# Altium PCB oscill_pcb.PcbDoc (part 1 of 2)
Units mm, origin at the board's own origin, x right, y up, seen from the top; angles counter-clockwise.
Board outline 100 x 110 mm, 4 copper layers (Top Layer, GND, Power, Bottom Layer), stack 1.565 mm thick; 124 components, 88 nets, 532 pads, 164 vias.
Unrouted connection lines stored in the file: 9.
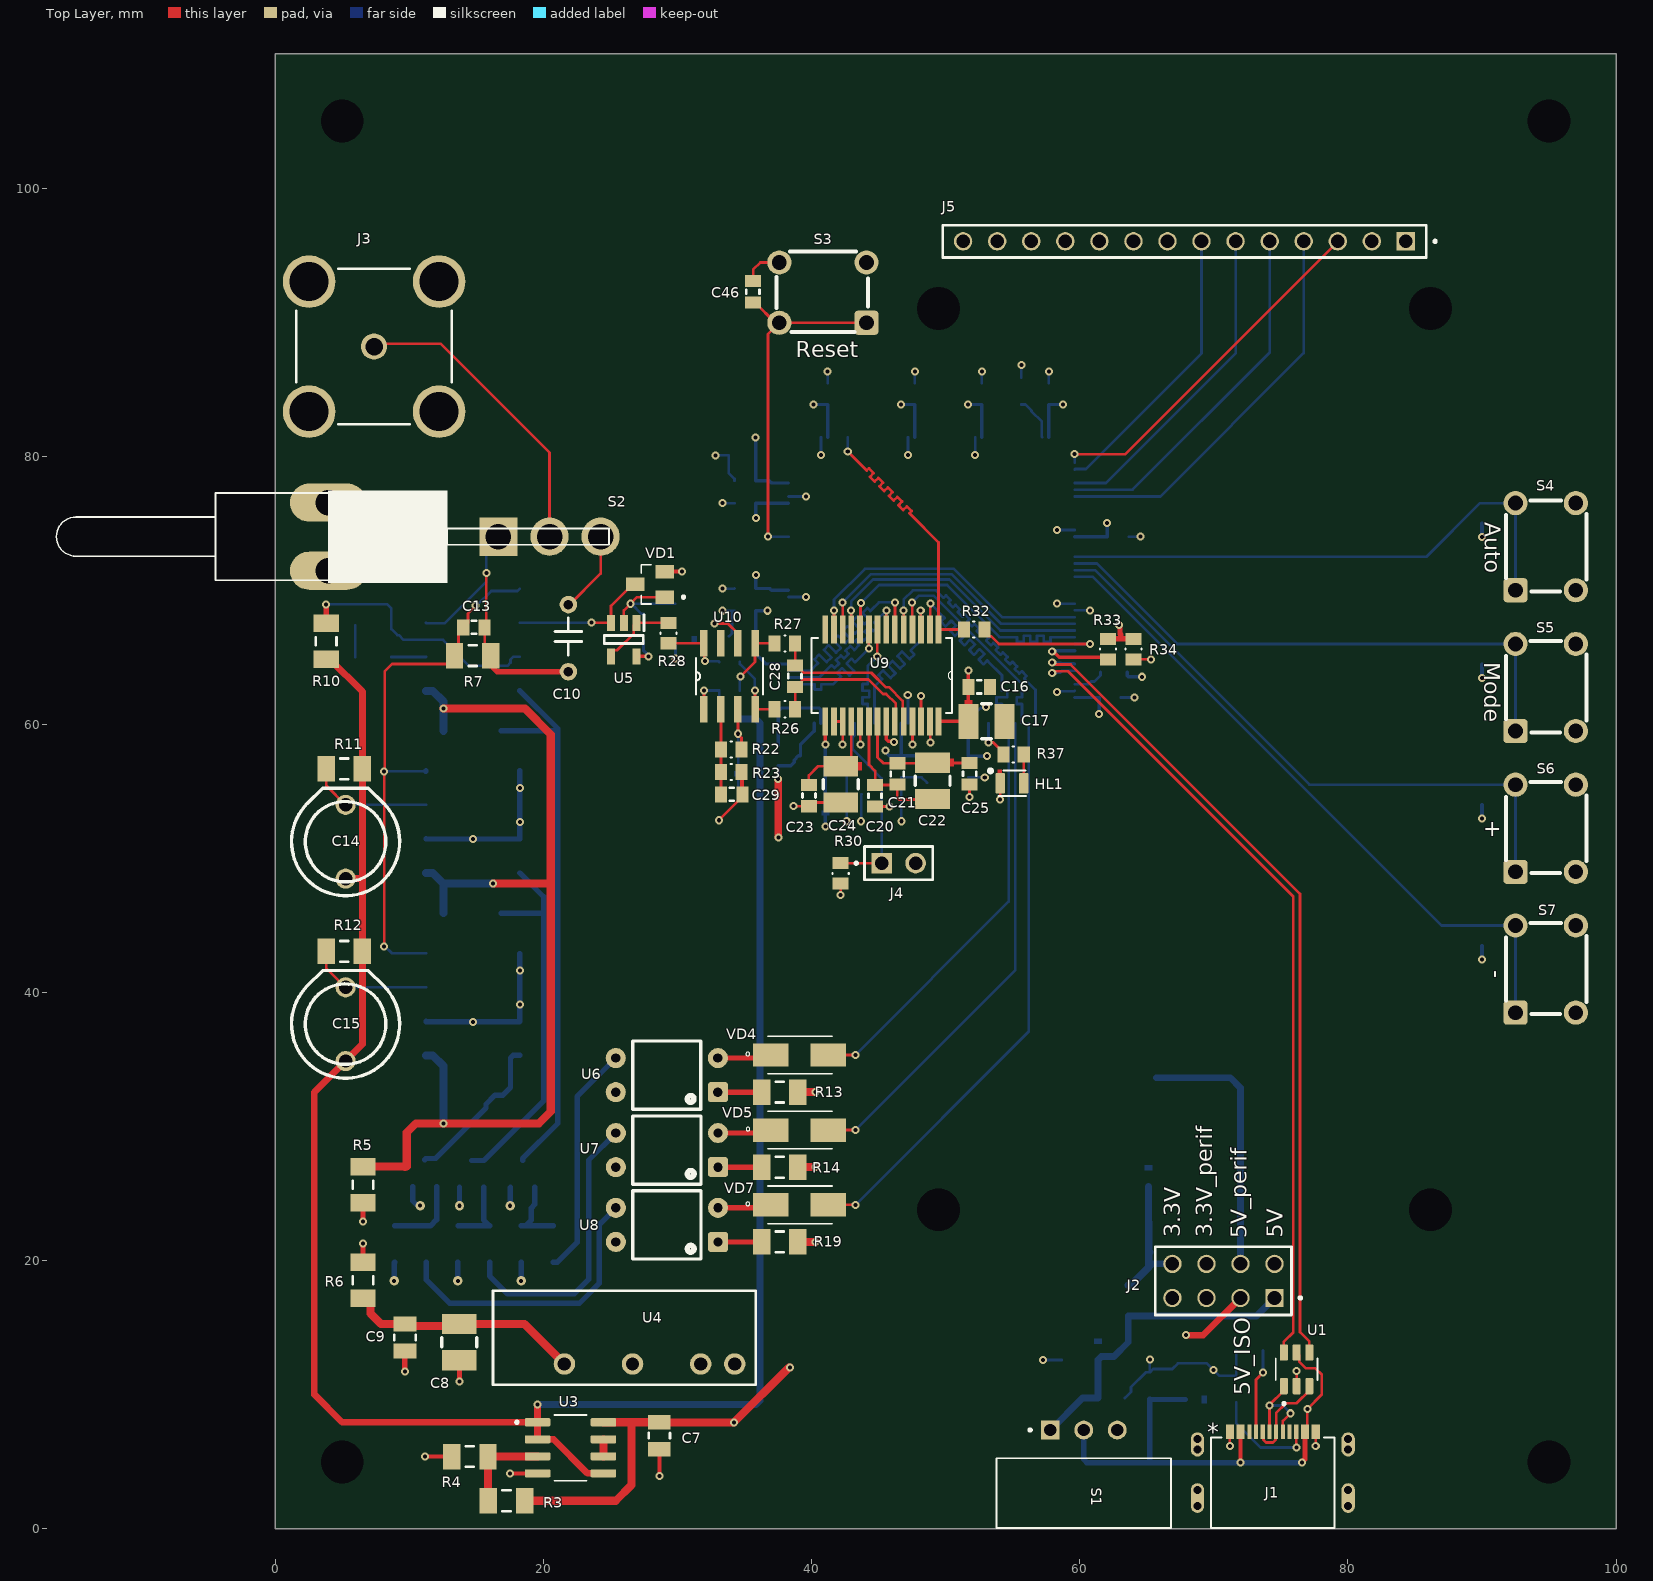
[diagram p0: Top Layer view]
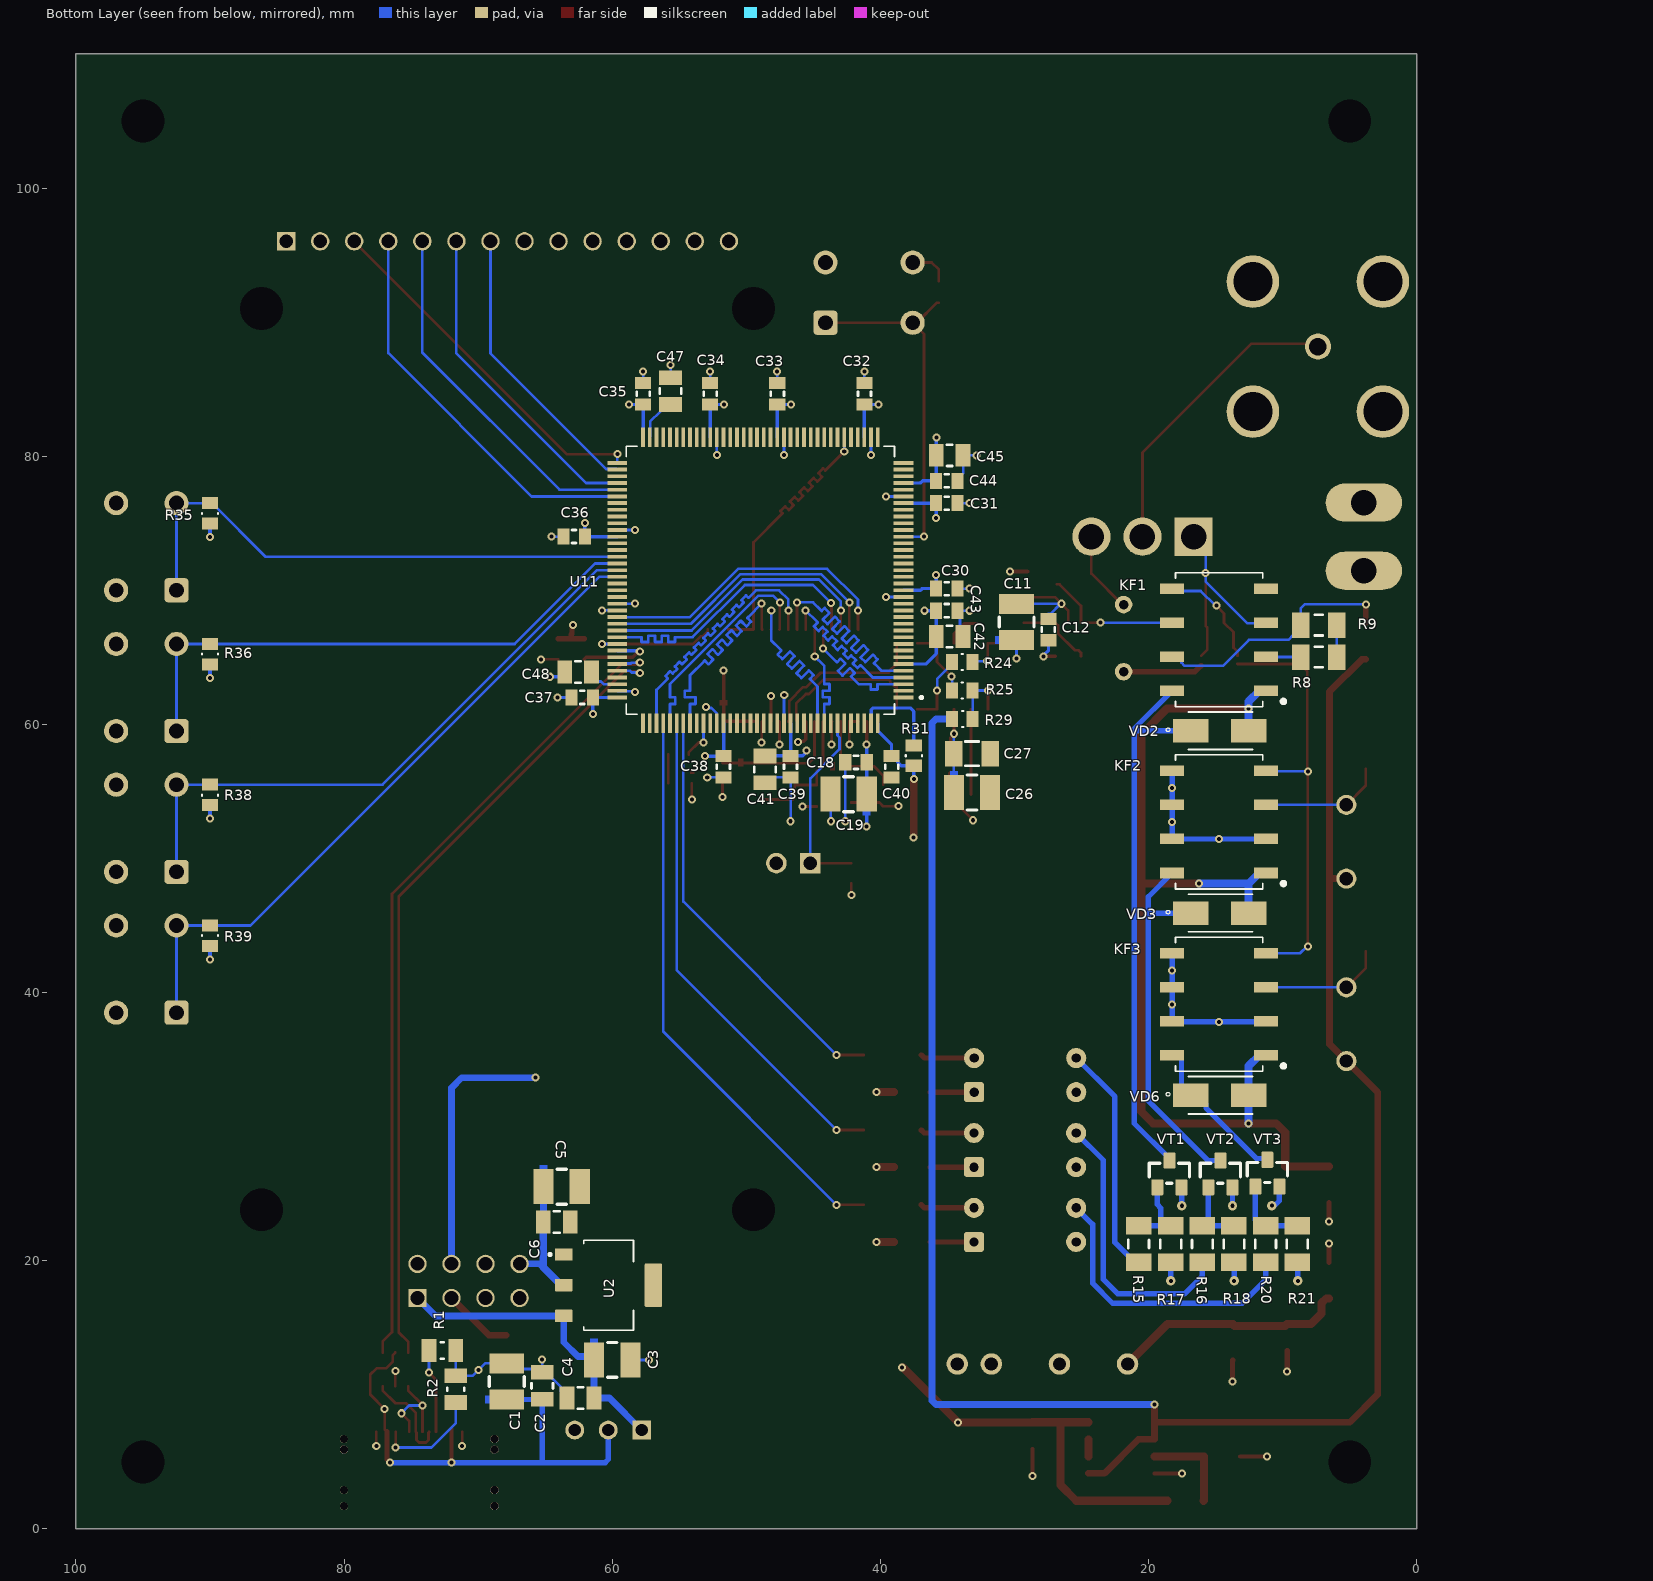
[diagram p1: Bottom Layer view, seen from below]
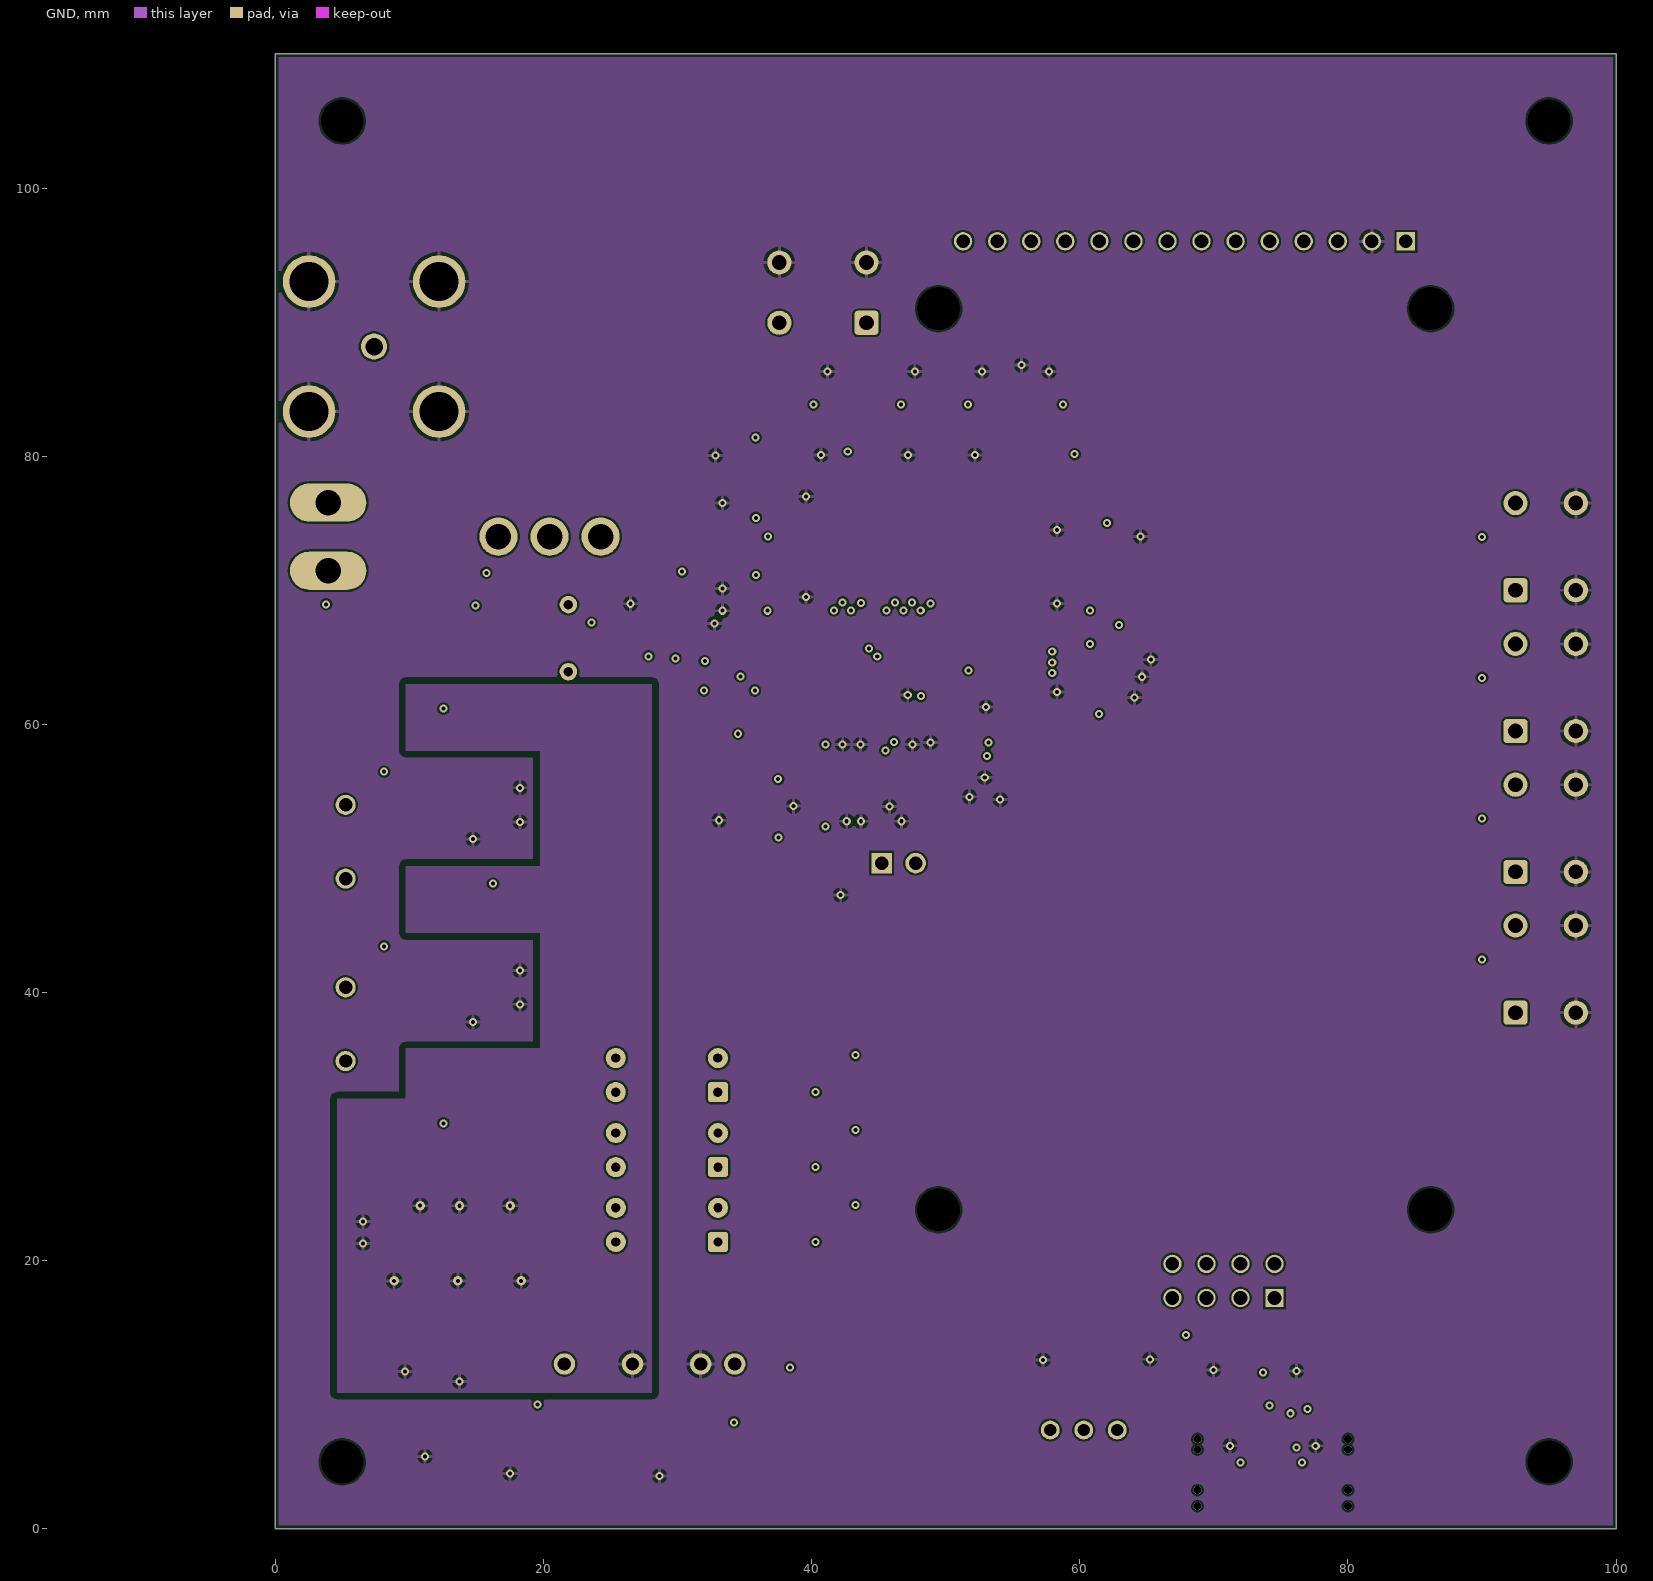
[diagram p2: GND]
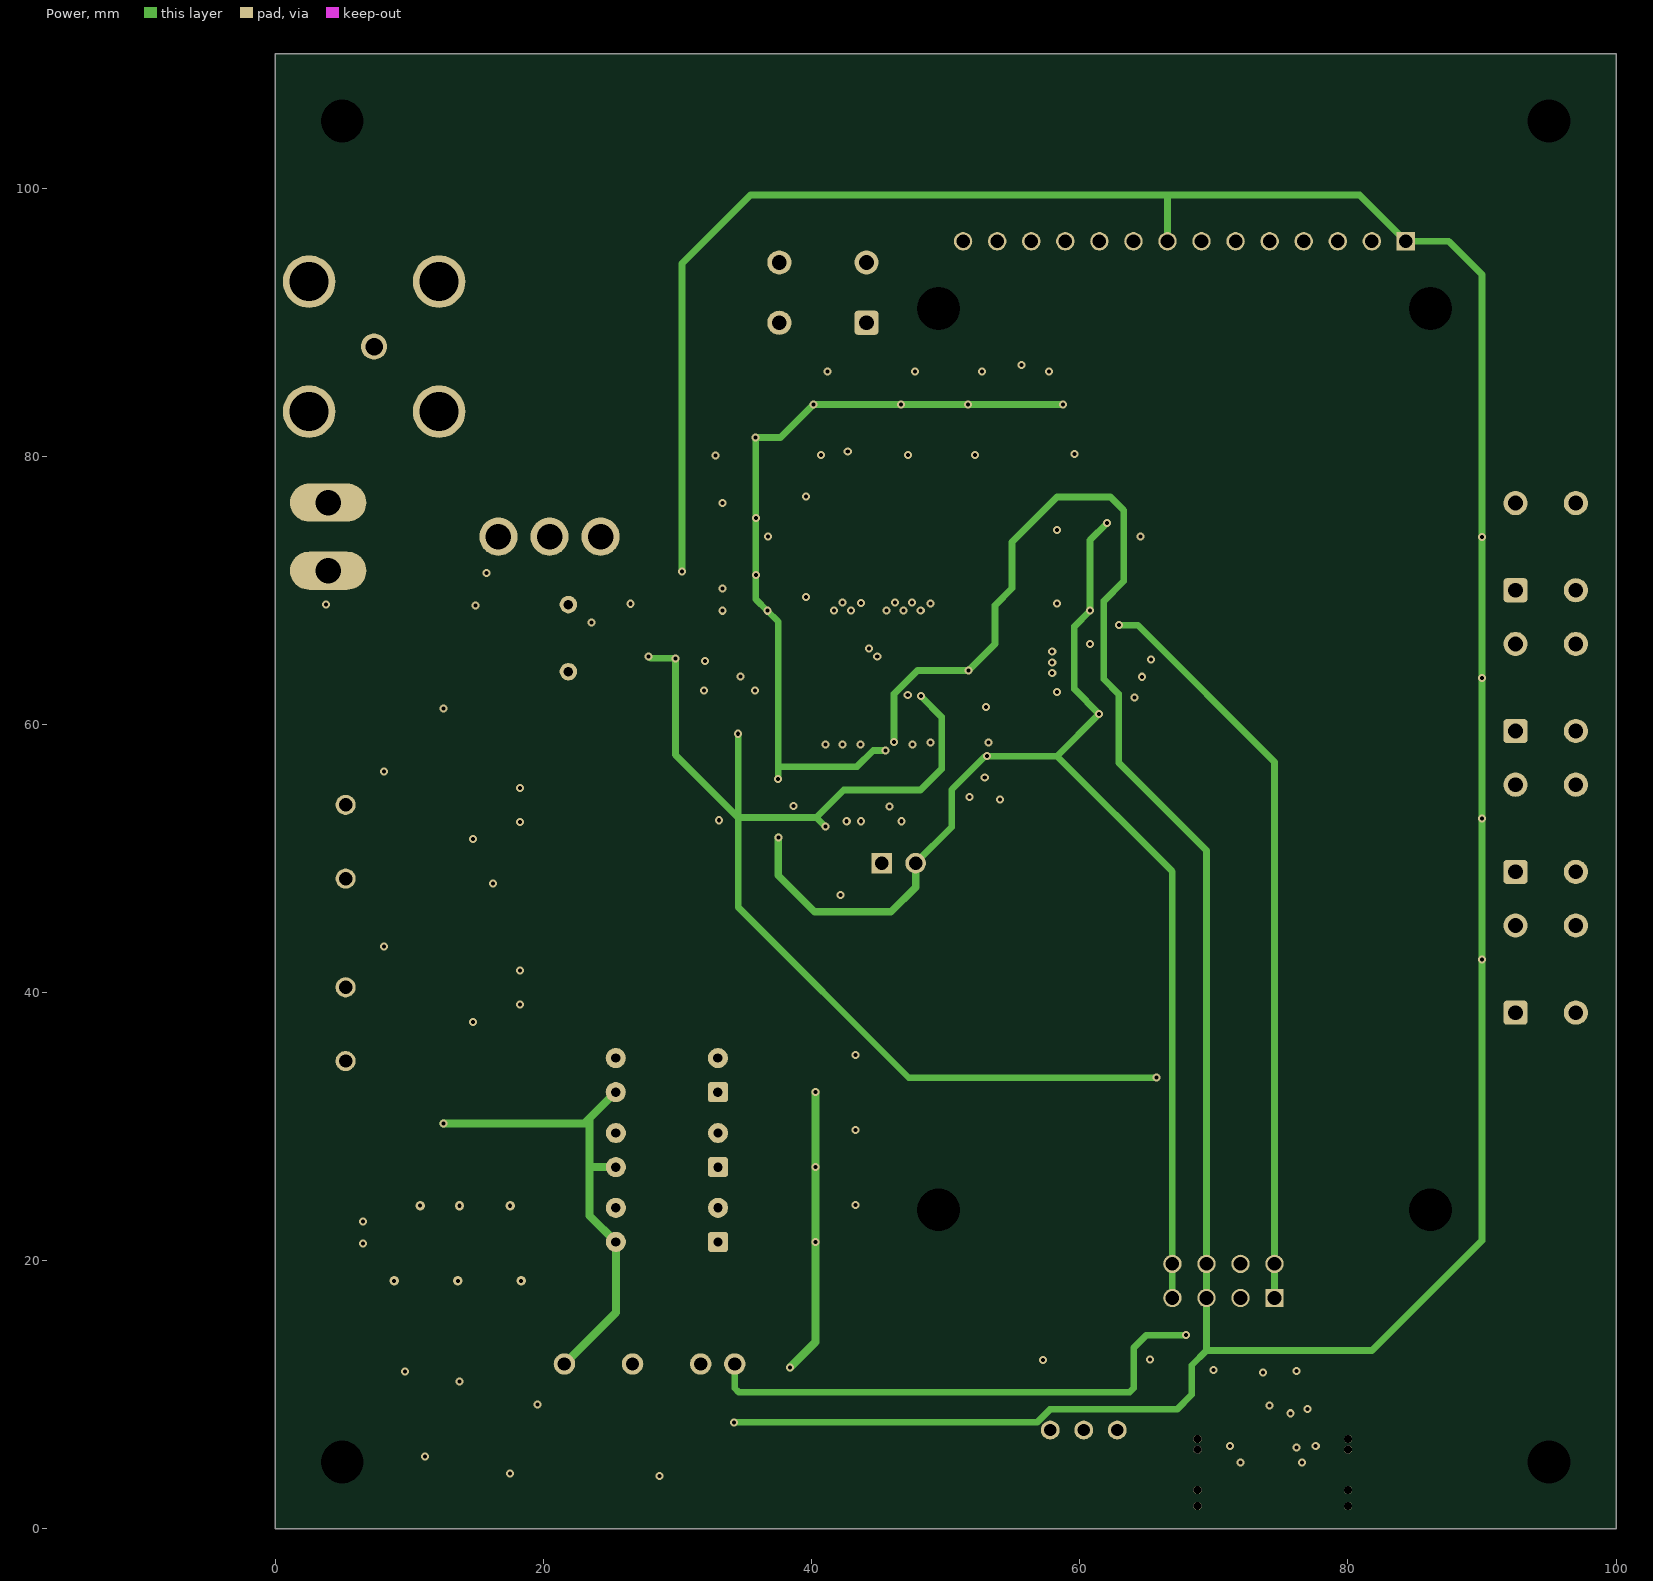
[diagram p3: Power]
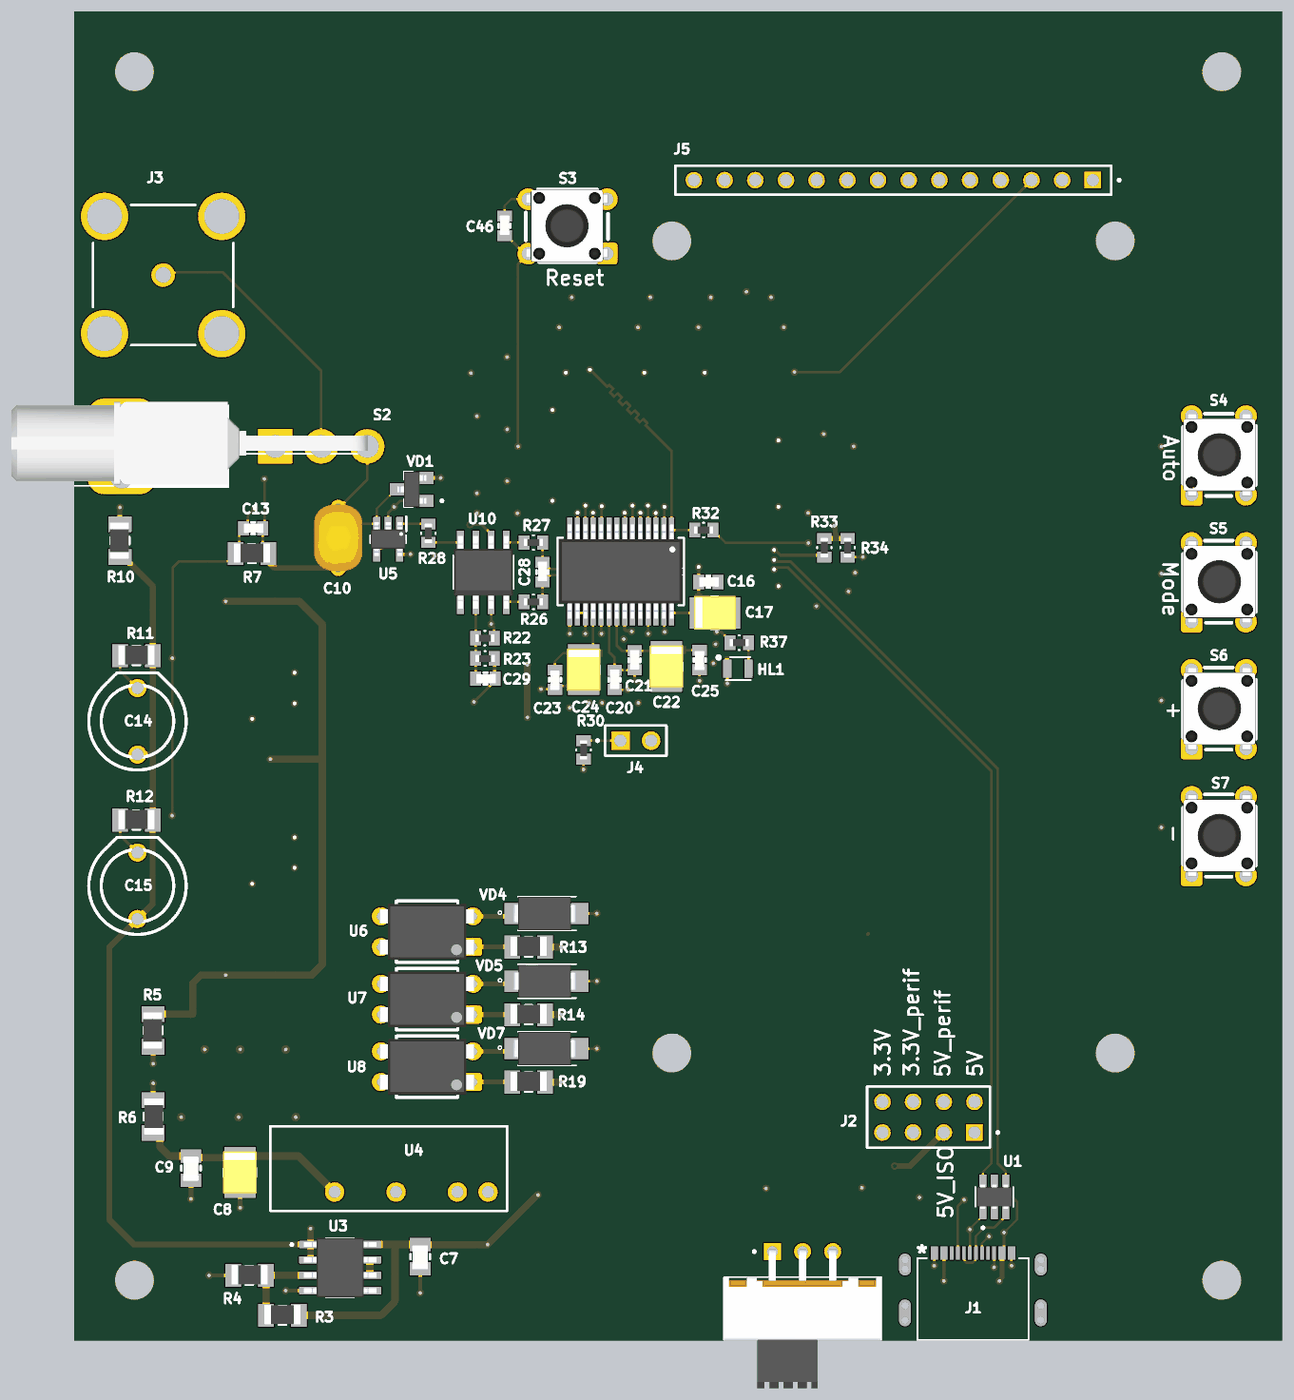
[diagram p5: 3D render of the assembled board from above, using the file's embedded part models]
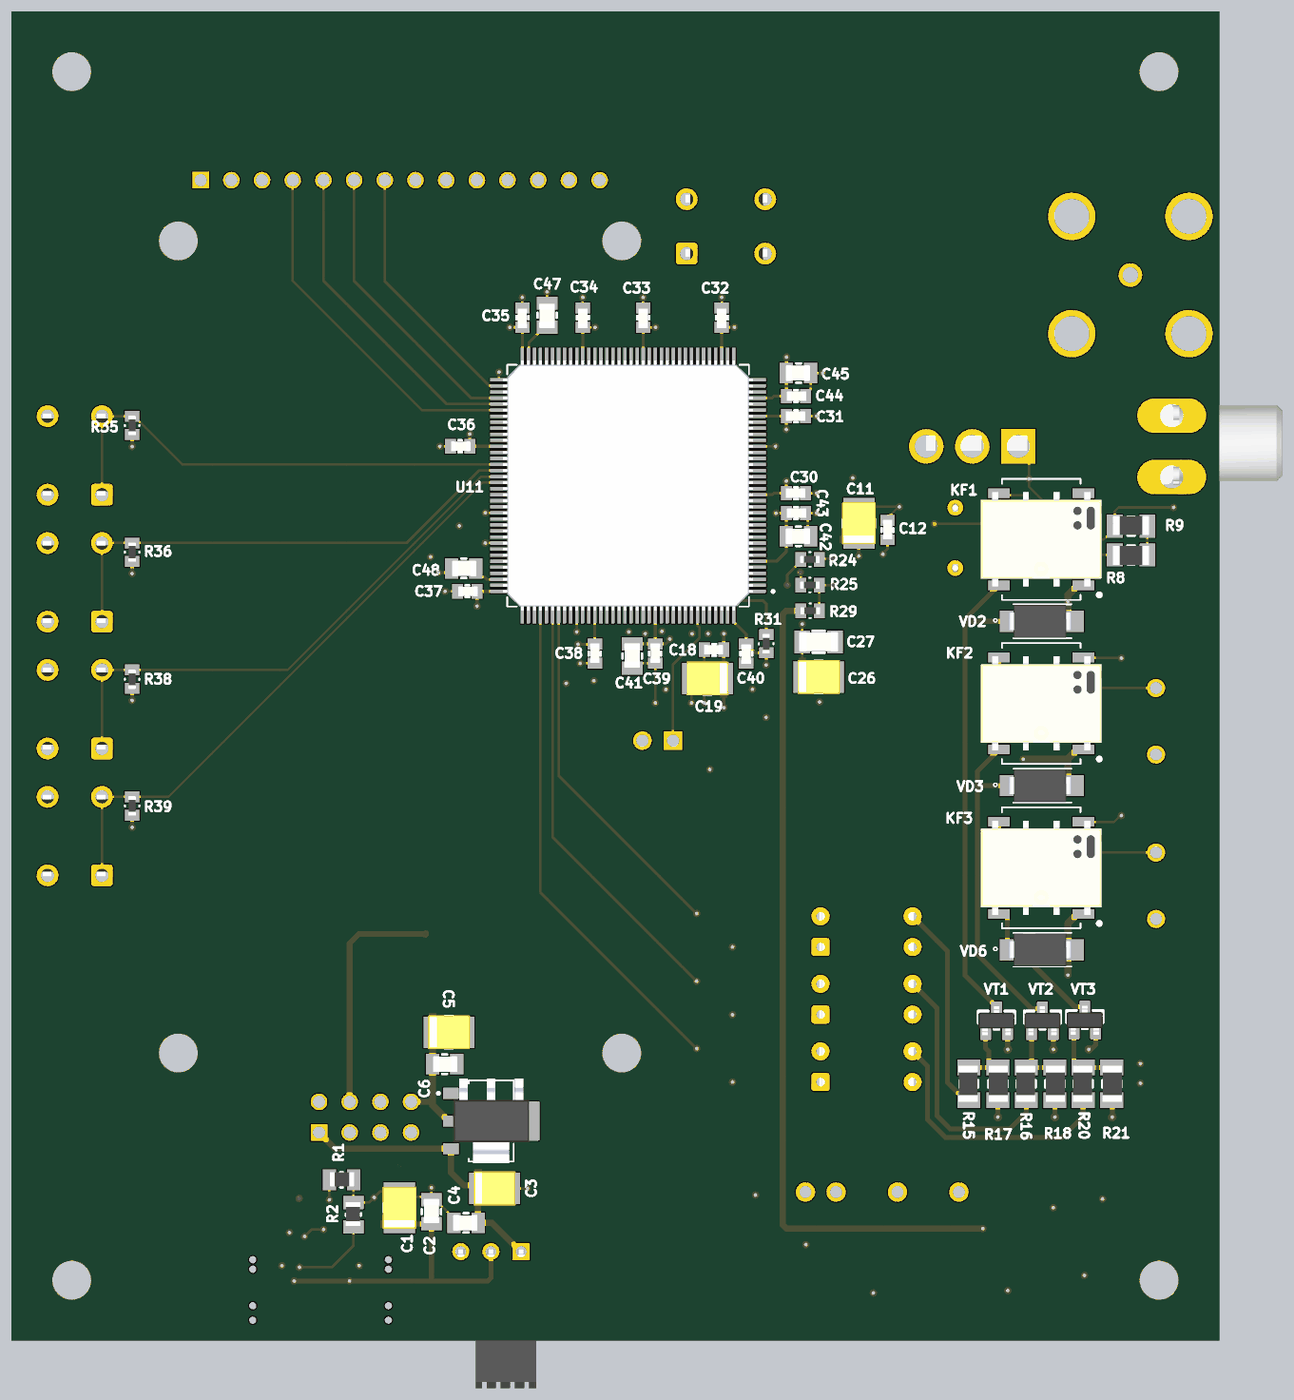
[diagram p6: 3D render of the assembled board from below, using the file's embedded part models]

## Layer stack, top to bottom
Top Solder: solder mask 0.0102, Solder Resist, Dk 3.5
Top Layer: signal copper 0.0356
Dielectric 1: prepreg 0.2032, PP-006, Dk 4.1
GND: signal copper 0.0356
Dielectric 2: dielectric 1.016, FR-4, Dk 4.8
Power: signal copper 0.0356
Dielectric 3: prepreg 0.2032, PP-006, Dk 4.1
Bottom Layer: signal copper 0.0356
Bottom Solder: solder mask 0.0102, Solder Resist, Dk 3.5

## Board outline
0,0 0,110 100,110 100,0

## Design rules (kind name [scope] priority, off if disabled: settings)
BoardOutlineClearance [All] p1: gap=0.25 ignorepadtopadclearanceinfootprint=FALSE
Clearance Clearance_polygons [InNet('GND') vs InNet('GND_ISO')] p1: gap=0.5 ignorepadtopadclearanceinfootprint=FALSE
Clearance [All] p2: gap=0.15 ignorepadtopadclearanceinfootprint=FALSE
DiffPairsRouting [All] p1: maxlimit=0.4 minlimit=0.3 mostfreqgap=0.3 toplayer_minwidth=0.2 toplayer_maxwidth=0.381 toplayer_prefwidth=0.3 midlayer1_minwidth=0.2 midlayer1_maxwidth=0.381 midlayer1_prefwidth=0.3 midlayer2_minwidth=0.2 midlayer2_maxwidth=0.381 midlayer2_prefwidth=0.3 bottomlayer_minwidth=0.2 bottomlayer_maxwidth=0.381 bottomlayer_prefwidth=0.3 maxuncoupledlength=12.7
Height [All] p1: minheight=0 maxheight=35 prefheight=12.7
HoleSize HoleSize_VIA [IsVia] p1: absolutevalues=TRUE maxlimit=0.3 minlimit=0.25 maxpercent=80.000 minpercent=20.000
HoleSize [All] p2: absolutevalues=TRUE maxlimit=2.54 minlimit=0.025 maxpercent=80.000 minpercent=20.000
MatchedLengths [InNetClass('ADC-MCU')] p1: tolerance=1 checknetsindiffpair=FALSE checkdiffpairvsdiffpair=TRUE checkxsignals=TRUE checkothers=TRUE
MinimumAnnularRing [All] p1: minimumring=0.2
PolygonConnect [All] p1: connectstyle=Relief reliefconductorwidth=0.254 reliefentries=4 polygonreliefangle="90 Angle" airgapwidth=0.254
RoutingVias [All] p1: holewidth=0.3 width=0.6 viastyle="Through Hole" minholewidth=0.3 minwidth=0.6 maxholewidth=0.711 maxwidth=1.27
SolderMaskExpansion SolderMaskExpansion_via [IsVia] p1: expansion=0.102 istentingtop=TRUE
SolderMaskExpansion [All] p2: expansion=0.102 istentingtop=FALSE
SupplyNets "Schematic Supply Nets" [InNet('GND')] p1: voltage=0.000
Width [All] p1: maxlimit=1 minlimit=0.2 preferedwidth=0.254
27 further rules are at their usual default settings.

## Classes and differential pairs
component class Controller: C30 C31 C32 C33 C34 C35 C36 C37 C38 C39 C40 C41 C42 C43 C44 C45 C46 C47 C48 HL1 J4 J5 R30 R31 R32 R33 R34 R35 R36 R37 R38 R39 S3 S4 S5 S6 S7 U11
component class ADC: C16 C17 C18 C19 C20 C21 C22 C23 C24 C25 C26 C27 C28 C29 R22 R23 R24 R25 R26 R27 R28 R29 U9 U10
differential pair VIN: +VIN_P -VIN_N
differential pair USB_contr: +USB_contr_P -USB_contr_N

## Components (designator, comment, footprint, x,y, rotation, side; value= is the part's Value field where it differs from the comment)
C1 "10uF" "Tant B" 67.875,9.75 r0 bottom
C2 "100nF" "Cap 0805 3D" 65.225,9.675 r0 bottom
C3 "10uF" "Tant B" 61.25,12.6 r90 bottom
C4 "100nF" "Cap 0805 3D" 61.368,9.758 r270 bottom
C5 "22uF" "Tant B" 65.025,25.525 r90 bottom
C6 "100nF" "Cap 0805 3D" 65.14,22.881 r90 bottom
C7 "100nF" "Cap 0805 3D" 28.65,7.95 r0 top
C8 "22uF" "Tant B" 13.725,15.175 r0 top
C9 "100nF" "Cap 0805 3D" 9.675,15.275 r0 top
C10 "1uF" "C__s 5-d 5.5-t4" 21.866,63.929 r90 top
C11 "10uF" "Tant B" 29.846,66.384 r0 bottom
C12 "100nF" "CAP 0603 3D" 27.465,66.273 r0 bottom
C13 "1.5pF" "CAP 0603 3D" 14.025,67.225 r90 top
C14 "30pF" Cvar 5.25,48.5 r90 top
C15 "60pF" Cvar 5.248,34.892 r90 top
C16 "100nF" "CAP 0603 3D" 51.699,62.781 r90 top
C17 "10uF" "Tant B" 51.8,60.225 r90 top
C18 "100nF" "CAP 0603 3D" 41.025,57.175 r270 bottom
C19 "10uF" "Tant B" 41.126,54.794 r270 bottom
C20 "100nF" "CAP 0603 3D" 44.743,53.884 r180 top
C21 "100nF" "CAP 0603 3D" 46.4,55.5 r180 top
C22 "10uF" "Tant B" 49.031,57.042 r0 top
C23 "100nF" "CAP 0603 3D" 39.8,55.493 r0 top
C24 "10uF" "Tant B" 42.181,56.777 r0 top
C25 "100nF" "CAP 0603 3D" 51.775,57.125 r0 top
C26 "10uF" "Tant B" 34.425,54.919 r90 bottom
C27 "100nF" "cap 1206 3D" 34.5,57.825 r90 bottom
C28 "68pF" "CAP 0603 3D" 38.775,62.8 r180 top
C29 "100nF" "CAP 0603 3D" 33.251,54.775 r90 top
C30 "100nF" "CAP 0603 3D" 34.25,70.132 r270 bottom
C31 "100nF" "CAP 0603 3D" 34.25,76.5 r270 bottom
C32 "100nF" "CAP 0603 3D" 41.2,85.45 r180 bottom
C33 "100nF" "CAP 0603 3D" 47.7,85.45 r180 bottom
C34 "100nF" "CAP 0603 3D" 52.7,85.45 r180 bottom
C35 "100nF" "CAP 0603 3D" 57.7,85.45 r180 bottom
C36 "100nF" "CAP 0603 3D" 63.65,74 r90 bottom
C37 "100nF" "CAP 0603 3D" 63.05,62 r90 bottom
C38 "100nF" "CAP 0603 3D" 51.7,56.05 r0 bottom
C39 "100nF" "CAP 0603 3D" 46.7,56.05 r0 bottom
C40 "100nF" "CAP 0603 3D" 39.175,57.65 r180 bottom
C41 "4.7uF" "Cap 0805 3D" 48.607,55.649 r0 bottom
C42 "1uF" "Cap 0805 3D" 33.844,66.56 r270 bottom
C43 "100nF" "CAP 0603 3D" 35.85,68.475 r90 bottom
C44 "100nF" "CAP 0603 3D" 35.85,78.157 r90 bottom
C45 "1uF" "Cap 0805 3D" 33.836,80.064 r270 bottom
C46 "100nF" "CAP 0603 3D" 35.643,91.452 r180 top
C47 "2.2uF" "Cap 0805 3D" 55.65,85.85 r180 bottom
C48 "2.2uF" "Cap 0805 3D" 63.551,63.907 r90 bottom
HL1 "fyls-0805???" "СД_SMD 2012_110" 54.071,55.608 r0 top
J1 "USB Type-C" 216990-0002_MOL 74.4,3.45 r0 top
J2 "Header 2x4 pin" SAMTEC_TSW-104-08-T-D 74.53,17.225 r180 top
J3 "BNC(F)" SAMTEC_BNC7T-J-P-XX-RA-BH1 7.375,88.175 r90 top
J4 "BOOT0 Header" SAMTEC_HTSW-102-07-TM-S 46.495,49.65 r180 top
J5 "Female Header 9 pin" SAMTEC_SSQ-114-02-T-S 67.815,96.025 r180 top
KF1 "G6K-2F" RELAY_G6K-2F 14.75,66.311 r0 bottom
KF2 "G6K-2F" RELAY_G6K-2F 14.75,52.73 r0 bottom
KF3 "G6K-2F" RELAY_G6K-2F 14.75,39.125 r0 bottom
R1 "5.1K" "Res_0805 3D" 73.668,13.307 r90 bottom
R2 "5.1K" "Res_0805 3D" 71.675,9.425 r0 bottom
R3 "10K" "Res_1206 3D" 15.95,2.1 r90 top
R4 "10K" "Res_1206 3D" 13.219,5.399 r90 top
R5 "250R" "Res_1206 3D" 6.55,24.375 r180 top
R6 "250R" "Res_1206 3D" 6.55,19.85 r0 top
R7 "910K" "Res_1206 3D" 13.425,65.125 r90 top
R8 "1K" "Res_1206 3D" 6.014,65.023 r270 bottom
R9 "1K" "Res_1206 3D" 8.614,67.399 r90 bottom
R10 "1M" "Res_1206 3D" 3.8,64.9 r180 top
R11 "100K" "Res_1206 3D" 3.858,56.683 r90 top
R12 "47.5K" "Res_1206 3D" 3.856,43.075 r90 top
R13 "330R" "Res_1206 3D" 36.325,32.575 r90 top
R14 "330R" "Res_1206 3D" 36.325,26.975 r90 top
R15 "150R" "Res_1206 3D" 20.75,19.95 r0 bottom
R16 "150R" "Res_1206 3D" 15.993,19.95 r0 bottom
R17 "47K" "Res_1206 3D" 18.35,22.55 r180 bottom
R18 "47K" "Res_1206 3D" 13.636,22.55 r180 bottom
R19 "330R" "Res_1206 3D" 36.324,21.4 r90 top
R20 "150R" "Res_1206 3D" 11.278,19.95 r0 bottom
R21 "47K" "Res_1206 3D" 8.921,22.55 r180 bottom
R22 "10K" "Res_0603 3D" 33.251,58.125 r90 top
R23 "10K" "Res_0603 3D" 34.775,56.45 r270 top
R24 "510R" "Res_0603 3D" 34.649,64.65 r90 bottom
R25 "510R" "Res_0603 3D" 34.649,62.525 r90 bottom
R26 "33R" "Res_0603 3D" 38.775,61.13 r270 top
R27 "33R" "Res_0603 3D" 38.775,66.044 r270 top
R28 "820R" "Res_0603 3D" 29.325,66.05 r180 top
R29 "820R" "Res_0603 3D" 33.126,60.4 r270 bottom
R30 "10K" "Res_0603 3D" 42.175,48.126 r180 top
R31 "10K" "Res_0603 3D" 37.514,56.914 r0 bottom
R32 "33R" "Res_0603 3D" 51.36,67.08 r90 top
R33 "33K" "Res_0603 3D" 62.1,66.374 r0 top
R34 "82K" "Res_0603 3D" 64.025,66.374 r0 top
R35 "10K" "Res_0603 3D" 90,74.976 r0 bottom
R36 "10K" "Res_0603 3D" 90,66 r180 bottom
R37 "620R" "Res_0603 3D" 54.3,57.75 r90 top
R38 "10K" "Res_0603 3D" 90,53.976 r0 bottom
R39 "10K" "Res_0603 3D" 90,45 r180 bottom
S1 "STS121RA04" TE_STS121RA04 57.8,7.375 r0 top
S2 "100SP1T1B1M7QE" 100SP1T1B1M7QE 3.95,74 r0 top
S3 "SWT-20-12.5" "250 _ 6,0-6,0-12,5" 44.1,89.95 r180 top
S4 "SWT-20-12.5" "250 _ 6,0-6,0-12,5" 92.5,70 r90 top
S5 "SWT-20-12.5" "250 _ 6,0-6,0-12,5" 92.5,59.5 r90 top
S6 "SWT-20-12.5" "250 _ 6,0-6,0-12,5" 92.5,49 r90 top
S7 "SWT-20-12.5" "250 _ 6,0-6,0-12,5" 92.5,38.5 r90 top
U1 "USBLC6-2SC6" SOT95P280X145-6N 76.175,11.9 r90 top
U2 "AMS1117-3.3" SOT229P700X180-4N 60.275,18.175 r270 bottom
U3 "MCP6002" SOIC127P600X175-8N#1 22.025,6.05 r0 top
U4 "B0505S-2W" B0505S-2W 34.27,12.3 r180 top
U5 "OPA356" SOT95P280X145-5N 26,66.325 r270 top
U6 "Optocoupler EL817 DIP-4" DIP-4 33.02,32.575 r180 top
U7 "Optocoupler EL817 DIP-4" DIP-4 33.025,26.985 r180 top
U8 "Optocoupler EL817 DIP-4" DIP-4 33.025,21.401 r180 top
U9 "AD9226ARSZ" SOP65P780X200-28N 45.246,63.646 r270 top
U10 "AD8132ARZ" SOIC127P600X175-8N#2 33.88,63.586 r90 top
U11 "STM32H723ZGT6" QFP50P2200X2200X160-144N 48.95,70.75 r0 bottom
VD1 "BAV99" DIO_BAV99 27.953,70.441 r180 top
VD2 "SS14" SMA 14.85,59.525 r180 bottom
VD3 "SS14" SMA 14.85,45.925 r180 bottom
VD4 "SS14" SMA 38.946,35.344 r0 top
VD5 "SS14" SMA 38.955,29.744 r0 top
VD6 "SS14" SMA 14.85,32.344 r180 bottom
VD7 "SS14" SMA 38.946,24.169 r0 top
VT1 "IRLML6344" SOT-23-3 19.354,25.475 r180 bottom
VT2 "IRLML6344" SOT-23-3 15.55,25.475 r180 bottom
VT3 "IRLML6344" SOT-23-3 12.046,25.531 r180 bottom

## Footprints (in the part's own frame and the unit in brackets; to place one, negate y for a bottom-side part, rotate by r counter-clockwise, add the part's x,y. Pads: shape width x height; smd on the part's side, far side on the other; paste and mask are expansions set on the pad)
100SP1T1B1M7QE [mm]
  rect 2.85x2.85 / inner round 2.85 / far side rect 2.85x2.85 hole 1.9 mask+0.102: 1(12.7,0)
  round 2.85 hole 1.9 mask+0.102: 2(16.51,0) 3(20.32,0)
  oval 5.7x2.85 hole 1.9 mask+0.102: 4(0,2.54) 5(0,-2.54)
  silkscreen extent -20.27,-3.43 20.95,3.43, body extent -19.25,-3.18 20.32,3.68, height 12.7
"250 _ 6,0-6,0-12,5" [mm]
  rrect30% 1.8x1.8 hole 1.1: 1(0,0)
  round 1.8 hole 1.1: 2(6.5,0) 3(0,-4.5) 4(6.5,-4.5)
  silkscreen extent -0.1,-5.3 6.7,0.7, body extent -0.1,-5.3 6.7,0.7, height 12.5
216990-0002_MOL [mil]
  oval 39x87 smd: 13(-221.26,-45.23) 14(221.26,-45.23)
  oval 39x71 smd: 15(-221.26,112.25) 16(221.26,112.25)
  rect 24x43 smd: A1/B12(-126,149.5) A4/B9(-94.5,149.5) B1/A12(126.01,149.5) B4/A9(94.51,149.5)
  rect 12x43 smd: A5(-49.23,149.5) A6(-9.84,149.5) A7(9.85,149.5) A8(49.23,149.5) B5(68.91,149.5) B6(29.54,149.5) B7(-29.53,149.5) B8(-68.91,149.5)
  round 24 hole 24 unplated: ""(-221,-69) ""(-221,-22) ""(-221,97) ""(-221,128) ""(221,-69) ""(221,-22) ""(221,97) ""(221,128)
  silkscreen extent -181,-133 181,133
B0505S-2W [mm] "Изолированный DC-DC преобразователь, вход 5В, выход 5В / 400мА / 2Вт"
  round 1.6 hole 1: 1(0,0) 2(2.54,0) 4(7.62,0) 6(12.7,0)
  silkscreen extent -1.58,-5.45 18.02,1.55
"C__s 5-d 5.5-t4" [mm] "Конденсатор керамический дисковый"
  round 1.3 hole 0.7 mask+0.1: 1(0,0) 2(5,0)
  silkscreen extent 1.25,-1 4,1, body extent -0.25,-2 5.25,2, height 8.45
"CAP 0603 3D" [mm] "Конденсатор керамический ЧИП (SMD)"
  rect 1.2x0.9 smd: 1(0,0) 2(0,-1.6)
  silkscreen extent -0.48,-0.95 0.5,-0.65, body extent -0.4,-1.65 0.4,-0.05, height 0.86
"Cap 0805 3D" [mm] "Конденсатор керамический ЧИП (SMD)"
  rect 1.7x1.1 smd: 1(0,0) 2(0,-2)
  silkscreen extent -0.8,-1.2 0.8,-0.8, body extent -0.65,-2.05 0.65,-0.05, height 1.27
"cap 1206 3D" [mm] "Конденсатор керамический ЧИП (SMD)"
  rect 1.9x1.3 smd: 1(0,0.025) 2(0,-2.675)
  silkscreen extent -0.9,-1.83 0.9,-0.83, body extent -0.8,-2.93 0.8,0.27, height 1.4
Cvar [mm]
  round 1.5 hole 1: 1(0,0) 2(5.5,0)
  silkscreen extent -1.28,-4.03 6.75,4.03
DIO_BAV99 [mm]
  rect 1.4x1 smd: 1(-1.1,0.95) 2(-1.1,-0.95) 3(1.1,0)
  silkscreen extent -2.6,-1.46 0.65,1.46, body extent -1.2,-1.46 1.2,1.46, height 1.2
DIP-4 [mm]
  rrect30% 1.5x1.5 hole 0.7: 1(0,0)
  round 1.5 hole 0.7: 2(0,-2.54) 3(7.62,-2.54) 4(7.62,0)
  silkscreen extent 1.27,-3.81 6.35,1.27, body extent -0.13,-3.57 7.75,1.03, height 4
QFP50P2200X2200X160-144N [mm]
  rect 1.47x0.28 smd: 1(-10.67,8.75) 2(-10.67,8.25) 3(-10.67,7.75) 4(-10.67,7.25) 5(-10.67,6.75) 6(-10.67,6.25) 7(-10.67,5.75) 8(-10.67,5.25) 9(-10.67,4.75) 10(-10.67,4.25) 11(-10.67,3.75) 12(-10.67,3.25) 13(-10.67,2.75) 14(-10.67,2.25) 15(-10.67,1.75) 16(-10.67,1.25) 17(-10.67,0.75) 18(-10.67,0.25) 19(-10.67,-0.25) 20(-10.67,-0.75) 21(-10.67,-1.25) 22(-10.67,-1.75) 23(-10.67,-2.25) 24(-10.67,-2.75) 25(-10.67,-3.25) 26(-10.67,-3.75) 27(-10.67,-4.25) 28(-10.67,-4.75) 29(-10.67,-5.25) 30(-10.67,-5.75) 31(-10.67,-6.25) 32(-10.67,-6.75) 33(-10.67,-7.25) 34(-10.67,-7.75) 35(-10.67,-8.25) 36(-10.67,-8.75) 73(10.67,-8.75) 74(10.67,-8.25) 75(10.67,-7.75) 76(10.67,-7.25) 77(10.67,-6.75) 78(10.67,-6.25) 79(10.67,-5.75) 80(10.67,-5.25) 81(10.67,-4.75) 82(10.67,-4.25) 83(10.67,-3.75) 84(10.67,-3.25) 85(10.67,-2.75) 86(10.67,-2.25) 87(10.67,-1.75) 88(10.67,-1.25) 89(10.67,-0.75) 90(10.67,-0.25) 91(10.67,0.25) 92(10.67,0.75) 93(10.67,1.25) 94(10.67,1.75) 95(10.67,2.25) 96(10.67,2.75) 97(10.67,3.25) 98(10.67,3.75) 99(10.67,4.25) 100(10.67,4.75) 101(10.67,5.25) 102(10.67,5.75) 103(10.67,6.25) 104(10.67,6.75) 105(10.67,7.25) 106(10.67,7.75) 107(10.67,8.25) 108(10.67,8.75)
  rect 0.28x1.47 smd: 37(-8.75,-10.67) 38(-8.25,-10.67) 39(-7.75,-10.67) 40(-7.25,-10.67) 41(-6.75,-10.67) 42(-6.25,-10.67) 43(-5.75,-10.67) 44(-5.25,-10.67) 45(-4.75,-10.67) 46(-4.25,-10.67) 47(-3.75,-10.67) 48(-3.25,-10.67) 49(-2.75,-10.67) 50(-2.25,-10.67) 51(-1.75,-10.67) 52(-1.25,-10.67) 53(-0.75,-10.67) 54(-0.25,-10.67) 55(0.25,-10.67) 56(0.75,-10.67) 57(1.25,-10.67) 58(1.75,-10.67) 59(2.25,-10.67) 60(2.75,-10.67) 61(3.25,-10.67) 62(3.75,-10.67) 63(4.25,-10.67) 64(4.75,-10.67) 65(5.25,-10.67) 66(5.75,-10.67) 67(6.25,-10.67) 68(6.75,-10.67) 69(7.25,-10.67) 70(7.75,-10.67) 71(8.25,-10.67) 72(8.75,-10.67) 109(8.75,10.67) 110(8.25,10.67) 111(7.75,10.67) 112(7.25,10.67) 113(6.75,10.67) 114(6.25,10.67) 115(5.75,10.67) 116(5.25,10.67) 117(4.75,10.67) 118(4.25,10.67) 119(3.75,10.67) 120(3.25,10.67) 121(2.75,10.67) 122(2.25,10.67) 123(1.75,10.67) 124(1.25,10.67) 125(0.75,10.67) 126(0.25,10.67) 127(-0.25,10.67) 128(-0.75,10.67) 129(-1.25,10.67) 130(-1.75,10.67) 131(-2.25,10.67) 132(-2.75,10.67) 133(-3.25,10.67) 134(-3.75,10.67) 135(-4.25,10.67) 136(-4.75,10.67) 137(-5.25,10.67) 138(-5.75,10.67) 139(-6.25,10.67) 140(-6.75,10.67) 141(-7.25,10.67) 142(-7.75,10.67) 143(-8.25,10.67) 144(-8.75,10.67)
  silkscreen extent -12.1,-10 10,10, body extent -11,-11 11,11, height 0.72
RELAY_G6K-2F [mm]
  rect 1.8x0.8 smd: 1(-3.5,3.81) 2(-3.5,1.27) 3(-3.5,-1.27) 4(-3.5,-3.81) 5(3.5,-3.81) 6(3.5,-1.27) 7(3.5,1.27) 8(3.5,3.81)
  silkscreen extent -4.94,-5 3.25,5, body extent -5,-3.9 5,3.9, height 5.4
"Res_0603 3D" [mm] "Резистор ЧИП (SMD)"
  rect 1.2x0.9 smd: 1(0,0) 2(0,-1.524)
  silkscreen extent -0.6,-0.8 0.6,-0.7, body extent -0.3,-1.55 0.3,0.05, height 0.63
"Res_0805 3D" [mm] "Резистор ЧИП (SMD)"
  rect 1.7x1.1 smd: 1(0,0) 2(0,-2)
  silkscreen extent -0.63,-1.1 0.63,-0.9, body extent -0.55,-2.05 0.65,-0.05, height 0.5
"Res_1206 3D" [mm] "Резистор ЧИП (SMD)"
  rect 1.9x1.3 smd: 1(0,0.05) 2(0,-2.65)
  silkscreen extent -0.77,-1.6 0.78,-1, body extent -0.75,-2.8 0.85,0.2, height 0.63
SAMTEC_BNC7T-J-P-XX-RA-BH1 [mm]
  round 1.95 hole 1.3: 1(0,0)
  round 3.916 hole 2.9: S1(-4.85,4.85) S2(4.85,4.85) S3(4.85,-4.85) S4(-4.85,-4.85)
  silkscreen extent -5.8,-5.8 5.8,5.8
SAMTEC_HTSW-102-07-TM-S [mm]
  rect 1.53x1.53 hole 1.02: 01(1.27,0)
  round 1.53 hole 1.02: 02(-1.27,0)
  silkscreen extent -2.54,-1.24 3.26,1.24
SAMTEC_SSQ-114-02-T-S [mm]
  rect 1.37x1.37 hole 1.02: 01(-16.51,0)
  round 1.37 hole 1.02: 02(-13.97,0) 03(-11.43,0) 04(-8.89,0) 05(-6.35,0) 06(-3.81,0) 07(-1.27,0) 08(1.27,0) 09(3.81,0) 10(6.35,0) 11(8.89,0) 12(11.43,0) 13(13.97,0) 14(16.51,0)
  silkscreen extent -18.78,-1.2 18.04,1.2
SAMTEC_TSW-104-08-T-D [mm]
  rect 1.37x1.37 hole 1.02: 01(0,0)
  round 1.37 hole 1.02: 02(0,-2.54) 03(2.54,0) 04(2.54,-2.54) 05(5.08,0) 06(5.08,-2.54) 07(7.62,0) 08(7.62,-2.54)
  silkscreen extent -2.02,-3.81 8.89,1.27
SMA [mm]
  rect 2.65x1.75 smd paste+0 mask+0.102: P1(-2,0) P2(2.3,0)
  silkscreen extent -3.84,-1.4 2.6,1.4, body extent -2.6,-1.36 2.6,1.36, height 2.5
SOIC127P600X175-8N#1 [mm]
  rrect25% 1.9x0.6 smd: 1(-2.455,1.905) 2(-2.455,0.635) 3(-2.455,-0.635) 4(-2.455,-1.905) 5(2.455,-1.905) 6(2.455,-0.635) 7(2.455,0.635) 8(2.455,1.905)
  silkscreen extent -4.1,-2.45 1.19,2.45, body extent -3,-2.45 3,2.45, height 1.75
SOIC127P600X175-8N#2 [mm] "2"
  rect 1.981x0.559 smd: 1(-2.464,1.905) 2(-2.464,0.635) 3(-2.464,-0.635) 4(-2.464,-1.905) 5(2.464,-1.905) 6(2.464,-0.635) 7(2.464,0.635) 8(2.464,1.905)
  silkscreen extent -1.37,-2.49 1.37,2.49, body extent -3,-2.45 3,2.45, height 1.75
SOP65P780X200-28N [mil]
  rect 81x17 smd: 1(-135,166) 2(-135,141) 3(-135,115) 4(-135,90) 5(-135,64) 6(-135,38) 7(-135,13) 8(-135,-13) 9(-135,-38) 10(-135,-64) 11(-135,-90) 12(-135,-115) 13(-135,-141) 14(-135,-166) 15(135,-166) 16(135,-141) 17(135,-115) 18(135,-90) 19(135,-64) 20(135,-38) 21(135,-13) 22(135,13) 23(135,38) 24(135,64) 25(135,90) 26(135,115) 27(135,141) 28(135,166)
  silkscreen extent -110,-206 110,207, body extent -154,-201 154,201, height 79
SOT95P280X145-5N [mm]
  rect 1.2x0.6 smd paste+0 mask+0.102: 1(-1.25,0.95) 2(-1.25,0) 3(-1.25,-0.95) 4(1.25,-0.95) 5(1.25,0.95)
  silkscreen extent -1.85,-1.45 0.3,1.5, body extent -1.4,-1.45 1.4,1.45, height 1.45
SOT95P280X145-6N [mm]
  rrect25% 1.21x0.59 smd: 1(-1.255,0.95) 2(-1.255,0) 3(-1.255,-0.95) 4(1.255,-0.95) 5(1.255,0) 6(1.255,0.95)
  silkscreen extent -2.65,-1.57 0.81,1.57, body extent -1.4,-1.46 1.4,1.46, height 0.4
SOT229P700X180-4N [mm]
  rrect15% 0.93x1.31 smd: 1(-2.29,-3.345) 2(0,-3.345) 3(2.29,-3.345)
  rrect15% 3.24x1.31 smd: 4(0,3.345)
  silkscreen extent -3.36,-4.47 3.36,1.86, body extent -3.5,-3.15 3.5,3.15, height 1.8
SOT-23-3 [mm] "TO-236AB    SuperSOT-3   SOT-346   KT-46   SC-59   SMT3"
  rrect20% 0.9x1.2 smd: 1(0,0) 2(0.9,2) 3(1.8,0)
  silkscreen extent -0.6,0.3 2.4,1.8, body extent -0.6,-0.2 2.4,2.2, height 1
"Tant B" [mm] "Конденсатор тантал ЧИП (SMD)"
  rect 2.6x1.5 smd: 1(0,0.1) 2(0,-2.6)
  Top Layer region: 1.601,0.399 1.601,-0.201 1.201,-0.201 1.201,0.399
  silkscreen extent -1.3,-1.6 1.3,-0.9, body extent -1.4,-3 1.4,0.5, height 1.9
TE_STS121RA04 [mm]
  rect 1.408x1.408 / inner round 1.408 / far side rect 1.408x1.408 hole 0.9: 1(0,0)
  round 1.408 hole 0.9: 2(2.5,0) 3(5,0)
  silkscreen extent -4,-7.3 9,0.1, body extent -4,-11.3 9,0.2, height 6.1
"СД_SMD 2012_110" [mm]
  rrect10% 0.7x1.5 smd: 1(0,0) 2(1.75,0)
  Top Layer region: -0.2,0.7 0.15,0.7 0.15,1.025 -0.2,1.025
  silkscreen extent -0.86,-0.95 1.92,1.06, body extent -0.12,-0.62 1.88,0.63, height 1.1

## Part data
C1 C3 C11 C17 C19 C22 C24 C26: library part "C T", "SMD type B 10 uF min 16V"
C2 C4 C6 C7 C9: library part C, "SMD 0805 100nF"
C5 C8: library part "C T", "SMD type B 22 uF min 16V"
C10: library part C_Disk, "Конденсатор керамика"
C12 C16 C18 C20 C21 C23 C25 C27 C29 C43 C44 C46: library part C, "0603 100nF X7R"
C13: library part C, "0603 1.5pF X7R"
C14 C15: library part Сvar
C28: library part C, "0805 68pF NP0 (C0G)"
C30 C31 C32 C33 C34 C35 C36 C37 C38 C39 C40: library part C, "0805 100nF X7R"
C41: library part C, "0805 4.7 uF min 6V"
C42: library part C, "0805 1uF min 6V"
C45: library part C, "0805 1 uF X7R"
C47 C48: library part C, "0805 2.2 uF X7R ESR<100 mOhm"
HL1: library part fyls-0805...., "Св. д. ЧИП 2012 (0805)"
J1: library part 2169900002, Package=None, Availability=Unavailable, MF="{'manufacturer': u'Molex'}", MP=2169900002, Price=None
J2: library part TSW-104-08-T-D, Package=None, Availability=Unavailable, MP=TSW-104-08-T-D, Price=None
J3: library part BNC7T-J-P-XX-RA-BH1, "Connecteur BNC Jack, Embase femelle 75Ohm Montage sur panneau, Traversant, Soudure Ã  angle droit", Package=None, Availability="In Stock", Check_prices=https://www.snapeda.com/parts/BNC7T-J-P-HN-RA-BH1/Samtec+Inc./view-part/?ref=eda, MF=Samtec, MP=BNC7T-J-P-HN-RA-BH1, Price=None, Purchase-URL=https://pricing.snapeda.com/search/part/BNC7T-J-P-HN-RA-BH1/?ref=eda, SnapEDA_Link=https://www.snapeda.com/parts/BNC7T-J-P-HN-RA-BH1/Samtec+Inc./view-part/?ref=snap
J4: library part HTSW-102-07-TM-S, "HEADER, 2 CONTACTS, 1 ROW, THROUGH HOLE, 2.54 MM; Connector Systems:Board-to-Board; Pitch Spacing:2.54mm; No. of Rows:1Rows; No. of Contacts:2Contacts; Contact Termination Type:Through Hole; Product Range:HTSW Series; Gender:Header RoHS Compliant: Yes", Package=None, Availability="In Stock", Check_prices=https://www.snapeda.com/parts/HTSW10207TMS/Samtec/view-part/?ref=eda, MF=Samtec, MP=HTSW10207TMS, Price=None, Purchase-URL=https://pricing.snapeda.com/search/part/HTSW10207TMS/?ref=eda, SnapEDA_Link=https://www.snapeda.com/parts/HTSW10207TMS/Samtec/view-part/?ref=snap
J5: library part SSQ-114-02-T-S, "CONNECTOR, RECEPTACLE, 14 CONTACTS, 1 ROW, THROUGH HOLE, 2.54 MM; Connector Systems:Board-to-Board; Pitch Spacing:2.54mm; No. of Rows:1Rows; No. of Contacts:14Contacts; Connector Mounting:Through Hole Mount; Product Range:SSQ Series RoHS Compliant: Yes", Package=None, Availability="In Stock", Check_prices=https://www.snapeda.com/parts/SSQ11402TS/Samtec/view-part/?ref=eda, MF=Samtec, MP=SSQ11402TS, Price=None, Purchase-URL=https://pricing.snapeda.com/search/part/SSQ11402TS/?ref=eda, SnapEDA_Link=https://www.snapeda.com/parts/SSQ11402TS/Samtec/view-part/?ref=snap
KF1 KF2 KF3: "Telecom Relay DPDT (2 Form C) Surface Mount", Package="TDFN-6 Omron Electronics", Check_prices=https://www.snapeda.com/parts/G6K-2F/Omron/view-part/?ref=eda, MF=Omron, MP=G6K-2F, SnapEDA_Link=https://www.snapeda.com/parts/G6K-2F/Omron/view-part/?ref=snap
R1 R2 R32: library part R, "0603 0.1%"
R3 R4 R5 R6: library part R, "0805 10K"
R7: library part R, "1206 910K"
R8 R9: library part R, "1 KOhm 1206"
R10: library part R, "1 MOhm 1206"
R11: library part R, "100 KOhm 1206"
R12: library part R, "47.5 KOhm 1206"
R13 R14 R15 R16 R17 R18 R19 R20 R21: library part R
R22 R23: library part R, "10K 0805"
R24 R25 R26 R27 R28 R29: library part R, "0805 0.1%"
R30 R33 R34 R35 R36 R38 R39: library part R, "0603 1%"
R31 R37: library part R, "0603 1% 620R"
S1: "Slide Switch SPDT Through Hole, Right Angle", Package=None, Check_prices=https://www.snapeda.com/parts/STS121RA04/TE+Connectivity+ALCOSWITCH+Switches/view-part/?ref=eda, MF="TE Connectivity", MP=STS121RA04, SnapEDA_Link=https://www.snapeda.com/parts/STS121RA04/TE+Connectivity+ALCOSWITCH+Switches/view-part/?ref=snap
S2: "TOGGLE, 5A, 120VAC/28VDC SPDT, On-On, Panel Mount, Right Angle, Vertical", Package=None, Check_prices=https://www.snapeda.com/parts/100SP1T1B1M7QE/E-Switch/view-part/?ref=eda, MF=E-Switch, MP=100SP1T1B1M7QE, SnapEDA_Link=https://www.snapeda.com/parts/100SP1T1B1M7QE/E-Switch/view-part/?ref=snap
S3 S4 S5 S6 S7: library part 1_SWT-20-12.5, "Кнопка тактовая"
U1: "17V Clamp 5A (8/20Âµs) Ipp Tvs Diode Surface Mount SOT-23-6", Package="SOT-23-6 STMicroelectronics", Availability="In Stock", Check_prices=https://www.snapeda.com/parts/USBLC6-2SC6/STMicroelectronics/view-part/?ref=eda, MF=STMicroelectronics, MP=USBLC6-2SC6, Price=None, Purchase-URL=https://pricing.snapeda.com/search/part/USBLC6-2SC6/?ref=eda, SnapEDA_Link=https://www.snapeda.com/parts/USBLC6-2SC6/STMicroelectronics/view-part/?ref=snap
U2: library part AMS1117-5.0, "1A LOW DROPOUT VOLTAGE REGULATOR", Package="SOT-223 Seeed Technology", Availability="Not in stock", Check_prices=https://www.snapeda.com/parts/AMS1117-5.0/ams/view-part/?ref=eda, MF=ams, MP=AMS1117-5.0, Price=None, SnapEDA_Link=https://www.snapeda.com/parts/AMS1117-5.0/ams/view-part/?ref=snap
U3: library part MCP6002-I/SN, "Microchip , Dual Op Amp, 1MHzCMOS, Rail to Rail, 3V, 5V, 8-Pin SOIC", Package="SO-8 Microchip", Check_prices=https://www.snapeda.com/parts/MCP6002-I/SN/Microchip/view-part/?ref=eda, MF=Microchip, MP=MCP6002-I/SN, SnapEDA_Link=https://www.snapeda.com/parts/MCP6002-I/SN/Microchip/view-part/?ref=snap
U4: "Изолированный DC-DC преобразователь, вход 5В, выход 5В 3Вт"
U5: library part OPA356AIDBVR, "2.5V, 200MHz GBW, CMOS Single Op Amp", Package="SOT-23-5 Texas Instruments", Check_prices=https://www.snapeda.com/parts/OPA356AIDBVR/Texas+Instruments/view-part/?ref=eda, MF="Texas Instruments", MP=OPA356AIDBVR, SnapEDA_Link=https://www.snapeda.com/parts/OPA356AIDBVR/Texas+Instruments/view-part/?ref=snap
U6 U7 U8: library part EL817, "Оптрон выход - транзистор"
U9: "12-Bit, 65 MSPS Analog-to-Digital Converter", Package="SSOP-28 Analog Devices", Check_prices=https://www.snapeda.com/parts/AD9226ARSZ/Analog+Devices/view-part/?ref=eda, MF="Analog Devices", MP=AD9226ARSZ, SnapEDA_Link=https://www.snapeda.com/parts/AD9226ARSZ/Analog+Devices/view-part/?ref=snap
U10: "Low Cost, High Speed Differential Amplifier", Package="SOIC-8 Analog Devices", Check_prices=https://www.snapeda.com/parts/AD8132ARZ/Analog+Devices/view-part/?ref=eda, MF="Analog Devices", MP=AD8132ARZ, SnapEDA_Link=https://www.snapeda.com/parts/AD8132ARZ/Analog+Devices/view-part/?ref=snap
U11: "ARMÂ® CortexÂ®-M7 STM32H7 Microcontroller IC 32-Bit Single-Core 550MHz 1MB (1M x 8) FLASH 144-LQFP (20x20)", Package="LQFP-144 STMicroelectronics", Check_prices=https://www.snapeda.com/parts/STM32H723ZGT6/STMicroelectronics/view-part/?ref=eda, MF=STMicroelectronics, MP=STM32H723ZGT6, SnapEDA_Link=https://www.snapeda.com/parts/STM32H723ZGT6/STMicroelectronics/view-part/?ref=snap
VD1: "Diode Array 1 Pair Series Connection Standard 100V 215mA (DC) Surface Mount TO-236-3, SC-59, SOT-23-3", Package="SOT-23-3 Motorola", Availability="In Stock", Check_prices=https://www.snapeda.com/parts/BAV99/Onsemi/view-part/?ref=eda, MF="ON Semiconductor", MP=BAV99, Price=None, Purchase-URL=https://pricing.snapeda.com/search/part/BAV99/?ref=eda, SnapEDA_Link=https://www.snapeda.com/parts/BAV99/Onsemi/view-part/?ref=snap
VD2 VD3 VD4 VD5 VD6 VD7: "Diode Schottky 40 V 1A Surface Mount DO-214AC (SMA)", Package="SMA-2 ON Semiconductor", Check_prices=https://www.snapeda.com/parts/SS14/Onsemi/view-part/?ref=eda, MF=ON, MP=SS14, SnapEDA_Link=https://www.snapeda.com/parts/SS14/Onsemi/view-part/?ref=snap
VT1 VT2 VT3: library part "VT MOSFET-N", "Транзистор MOSFET N-канал IRLML6344"

## Free pads (board coordinates)
  round 0 hole 3.2: 2(5,5) 2(5,105) 2(95,5) 2(95,105) 3(49.475,23.8) 3(49.475,91) 3(86.175,23.8) 3(86.175,91)

## Via types
v1: diameter 0.6, hole 0.3, Top Layer to Bottom Layer, tented both sides, 154 vias
v2: diameter 0.7, hole 0.3, Top Layer to Bottom Layer, tented both sides, 6 vias
v3: diameter 0.6, hole 0.3, Power to Bottom Layer, tented both sides, 2 vias
v4: diameter 0.6, hole 0.3, Top Layer to GND, tented both sides, 1 vias
v5: diameter 0.6, hole 0.3, Top Layer to Power, tented both sides, 1 vias

## Nets (pads, with @x,y where several pads share a name; then routed paths per layer and width w, separated by ;. In a path a pad name is that pad's centre, name@x,y a point inside that pad or via, vN(x,y) a via of type N, cw(c..) or ccw(c..) an arc to the next point about the centre after c; other vN are vias at no path point)
Atten_output: R28.2 U5.1 U5.4 | length 5.8
  Top Layer w0.2: U5.4@25.05,65.075 25.05,65.337 25.25,65.537 25.512,65.537 26.75,66.775 26.75,67.375 U5.1@26.95,67.575 R28.2@29.325,67.574
Bit1: U9.13 U11.96 | length 22.6
  Top Layer w0.2: U9.13@41.665,67.075 41.67,67.08 41.67,68.495 v1(41.675,68.5)
  Bottom Layer w0.2: v1(41.675,68.5) 41.675,69.299 43.976,71.6 50.613,71.6 54.213,68 U11.96@59.62,68
Bit2: U9.12 U11.97 | length 21.7
  Top Layer w0.2: U9.12@42.325,67.075 v1(42.325,69.1)
  Bottom Layer w0.2: v1(42.325,69.1) 44.425,71.2 50.448,71.2 54.148,67.5 U11.97@59.62,67.5
Bit3: U9.11 U11.98 | length 21
  Top Layer w0.2: v1(42.95,68.5) 42.955,68.495 42.955,67.08 U9.11@42.96,67.075
  Bottom Layer w0.2: v1(42.95,68.5) 42.95,69.159 44.591,70.8 50.282,70.8 54.082,67 U11.98@59.62,67
Bit4: U9.10 U11.99 | length 22.6
  Top Layer w0.2: U9.10@43.62,67.075 43.651,67.106 43.651,69.012 v1(43.682,69.043)
  Bottom Layer w0.2: v1(43.682,69.043) 45.039,70.4 50.116,70.4 54.016,66.5 55.216,66.5 55.316,66.5 55.316,66.147 55.816,66.147 55.816,66.6 56.316,66.6 56.316,66.147 56.816,66.147 56.816,66.6 57.316,66.6 57.316,66.147 57.816,66.147 57.816,66.5 57.916,66.5 U11.99@59.62,66.5
Bit5: U9.9 U11.3 | length 11.7
  Top Layer w0.2: v1(44.275,65.65) 44.278,65.653 44.278,67.072 U9.9@44.281,67.075
  Bottom Layer w0.2: U11.3@38.28,63 40.115,63 40.215,63 40.215,62.6 40.715,62.6 40.715,63 40.815,63 41.625,63 42.12,63.495 42.191,63.566 41.917,63.84 42.27,64.193 42.827,63.636 43.181,63.99 42.624,64.547 42.977,64.9 43.251,64.626 43.322,64.697 v1(44.275,65.65)
Bit6: U9.8 U11.136 | length 9.1
  Top Layer w0.2: v1(44.9,65.075) 44.908,65.083 44.908,67.067 U9.8@44.916,67.075
  Bottom Layer w0.2: U11.136@44.2,60.08 44.2,61.415 44.2,61.515 43.8,61.515 43.8,62.015 44.3,62.015 44.3,62.515 43.8,62.515 43.8,63.015 44.2,63.015 44.2,63.115 44.2,64.375 v1(44.9,65.075)
Bit7: U9.7 U11.4 | length 14.6
  Top Layer w0.2: U9.7@45.576,67.076 v1@45.576,68.499
  Bottom Layer w0.2: U11.4@38.28,63.5 40.575,63.5 41.424,64.349 41.494,64.419 41.713,64.201 42.066,64.554 41.831,64.79 42.184,65.143 42.42,64.908 42.773,65.262 42.538,65.497 42.891,65.85 43.191,65.551 43.545,65.904 43.245,66.204 43.599,66.558 43.898,66.258 44.252,66.611 43.952,66.911 44.306,67.265 44.605,66.965 44.959,67.318 44.676,67.601 44.747,67.672 v1(45.575,68.5)
Bit8: U9.6 U11.5 | length 20.6
  Top Layer w0.2: U9.6@46.211,67.075 46.218,67.082 46.218,69.093 v1(46.225,69.1)
  Bottom Layer w0.2: U11.5@38.28,64 39.928,64 40.423,64.495 40.493,64.566 40.21,64.849 40.564,65.202 41.13,64.636 41.483,64.99 40.918,65.556 41.271,65.909 41.828,65.352 42.181,65.706 41.625,66.263 41.978,66.616 42.535,66.06 42.888,66.413 42.332,66.97 42.685,67.323 43.242,66.767 43.596,67.12 43.039,67.677 43.392,68.03 43.949,67.474 44.303,67.827 43.809,68.321 44.162,68.675 44.382,68.455 44.453,68.525 45.028,69.1 v1(46.225,69.1)
Bit9: U9.5 U11.111 | length 22.6
  Top Layer w0.2: U9.5@46.872,67.075 46.873,67.077 46.873,68.498 v1(46.875,68.5)
  Bottom Layer w0.2: v1(46.875,68.5) 46.875,69.324 47.551,70 49.277,70 49.772,69.505 49.842,69.434 50.027,69.619 50.38,69.265 50.196,69.081 50.549,68.727 50.734,68.911 51.087,68.558 50.903,68.374 51.257,68.02 51.441,68.204 51.794,67.851 51.61,67.667 51.964,67.313 52.148,67.497 52.501,67.144 52.317,66.959 52.671,66.606 52.855,66.79 53.209,66.437 53.024,66.252 53.378,65.899 53.562,66.083 53.916,65.73 53.731,65.545 54.085,65.192 54.269,65.376 54.623,65.022 54.438,64.838 54.792,64.485 54.976,64.669 55.33,64.315 55.146,64.131 55.499,63.777 55.683,63.962 56.037,63.608 55.853,63.424 55.923,63.353 56.7,62.577 U11.111@56.7,60.08
Bit10: U9.4 U11.113 | length 16.9
  Top Layer w0.2: v1(47.5,69.1) 47.516,69.084 47.516,67.091 U9.4@47.532,67.075
  Bottom Layer w0.2: v1(47.5,69.1) 48,69.6 49.111,69.6 55.7,63.011 55.7,62.115 55.7,62.015 55.3,62.015 55.3,61.515 55.7,61.515 55.7,61.415 U11.113@55.7,60.08
Bit11: U9.3 U11.135 | length 16
  Top Layer w0.2: v1(48.144,68.481) 48.155,68.469 48.155,67.087 U9.3@48.167,67.075
  Bottom Layer w0.2: U11.135@44.7,60.08 44.7,62.822 45.195,63.317 45.266,63.388 44.983,63.67 45.336,64.024 45.902,63.458 46.256,63.812 45.69,64.378 46.043,64.731 46.609,64.165 46.963,64.519 46.397,65.085 46.751,65.438 47.316,64.873 47.67,65.226 47.387,65.509 47.458,65.58 48.144,66.266 v1(48.144,68.481)
Bit12: U9.2 U11.116 | length 20.3
  Top Layer w0.2: U9.2@48.827,67.075 48.845,67.092 48.845,68.983 v1(48.862,69)
  Bottom Layer w0.2: v1(48.862,69) 49.852,68.01 49.923,67.939 49.64,67.657 49.994,67.303 50.418,67.727 50.772,67.374 50.347,66.949 50.701,66.596 51.125,67.02 51.479,66.667 51.054,66.242 51.408,65.889 51.832,66.313 52.186,65.959 51.762,65.535 52.115,65.182 52.539,65.606 52.893,65.252 52.469,64.828 52.822,64.475 53.105,64.757 53.176,64.687 54.2,63.662 54.2,62.615 54.2,62.515 54.6,62.515 54.6,62.015 53.8,62.015 53.8,61.515 54.2,61.515 54.2,61.415 U11.116@54.2,60.08
BTN_AUTO: R35.2 S4.1 S4.2 U11.87 | length 41
  Bottom Layer w0.2: U11.87@59.62,72.5 85.85,72.5 89.85,76.5 R35.2@90,76.5 S4.2@92.5,76.5 S4.1@92.5,70
BTN_DOWN: R39.1 S7.1 S7.2 U11.90 | length 50.1
  Bottom Layer w0.2: U11.90@59.62,71 60.982,71 86.982,45 R39.1@90,45 S7.2@92.5,45 S7.1@92.5,38.5
BTN_MODE: R36.1 S5.1 S5.2 U11.88 | length 41.9
  Bottom Layer w0.2: U11.88@59.62,72 61.275,72 67.275,66 R36.1@90,66 S5.2@92.5,66 S5.1@92.5,59.5
BTN_UP: R38.2 S6.1 S6.2 U11.89 | length 46
  Bottom Layer w0.2: U11.89@59.62,71.5 61.125,71.5 77.125,55.5 R38.2@90,55.5 S6.2@92.5,55.5 S6.1@92.5,49
CLK: R32.1 U9.1 U11.42 | length 22.6
  Top Layer w0.2: v1(42.7,80.338) 44.044,78.995 44.114,78.924 44.28,79.089 44.633,78.736 44.359,78.461 44.712,78.108 44.987,78.382 45.34,78.029 45.066,77.754 45.42,77.401 45.694,77.675 46.047,77.321 45.773,77.047 46.127,76.694 46.401,76.968 46.754,76.614 46.48,76.34 46.834,75.986 47.108,76.261 47.462,75.907 47.296,75.742 47.367,75.671 49.462,73.576 U9.1@49.462,67.075 51.355,67.075 R32.1@51.36,67.08
  Bottom Layer w0.2: v1(42.7,80.338) U11.42@42.7,81.42
  other v1: 42.7,80.338